# Altium PCB PCB1.PcbDoc
Units mm, origin at the board's own origin, x right, y up, seen from the top; angles counter-clockwise.
Board outline 80 x 100 mm, 2 copper layers (Top Layer, Bottom Layer), stack 1.571 mm thick; 51 components, 42 nets, 209 pads, 13 vias.
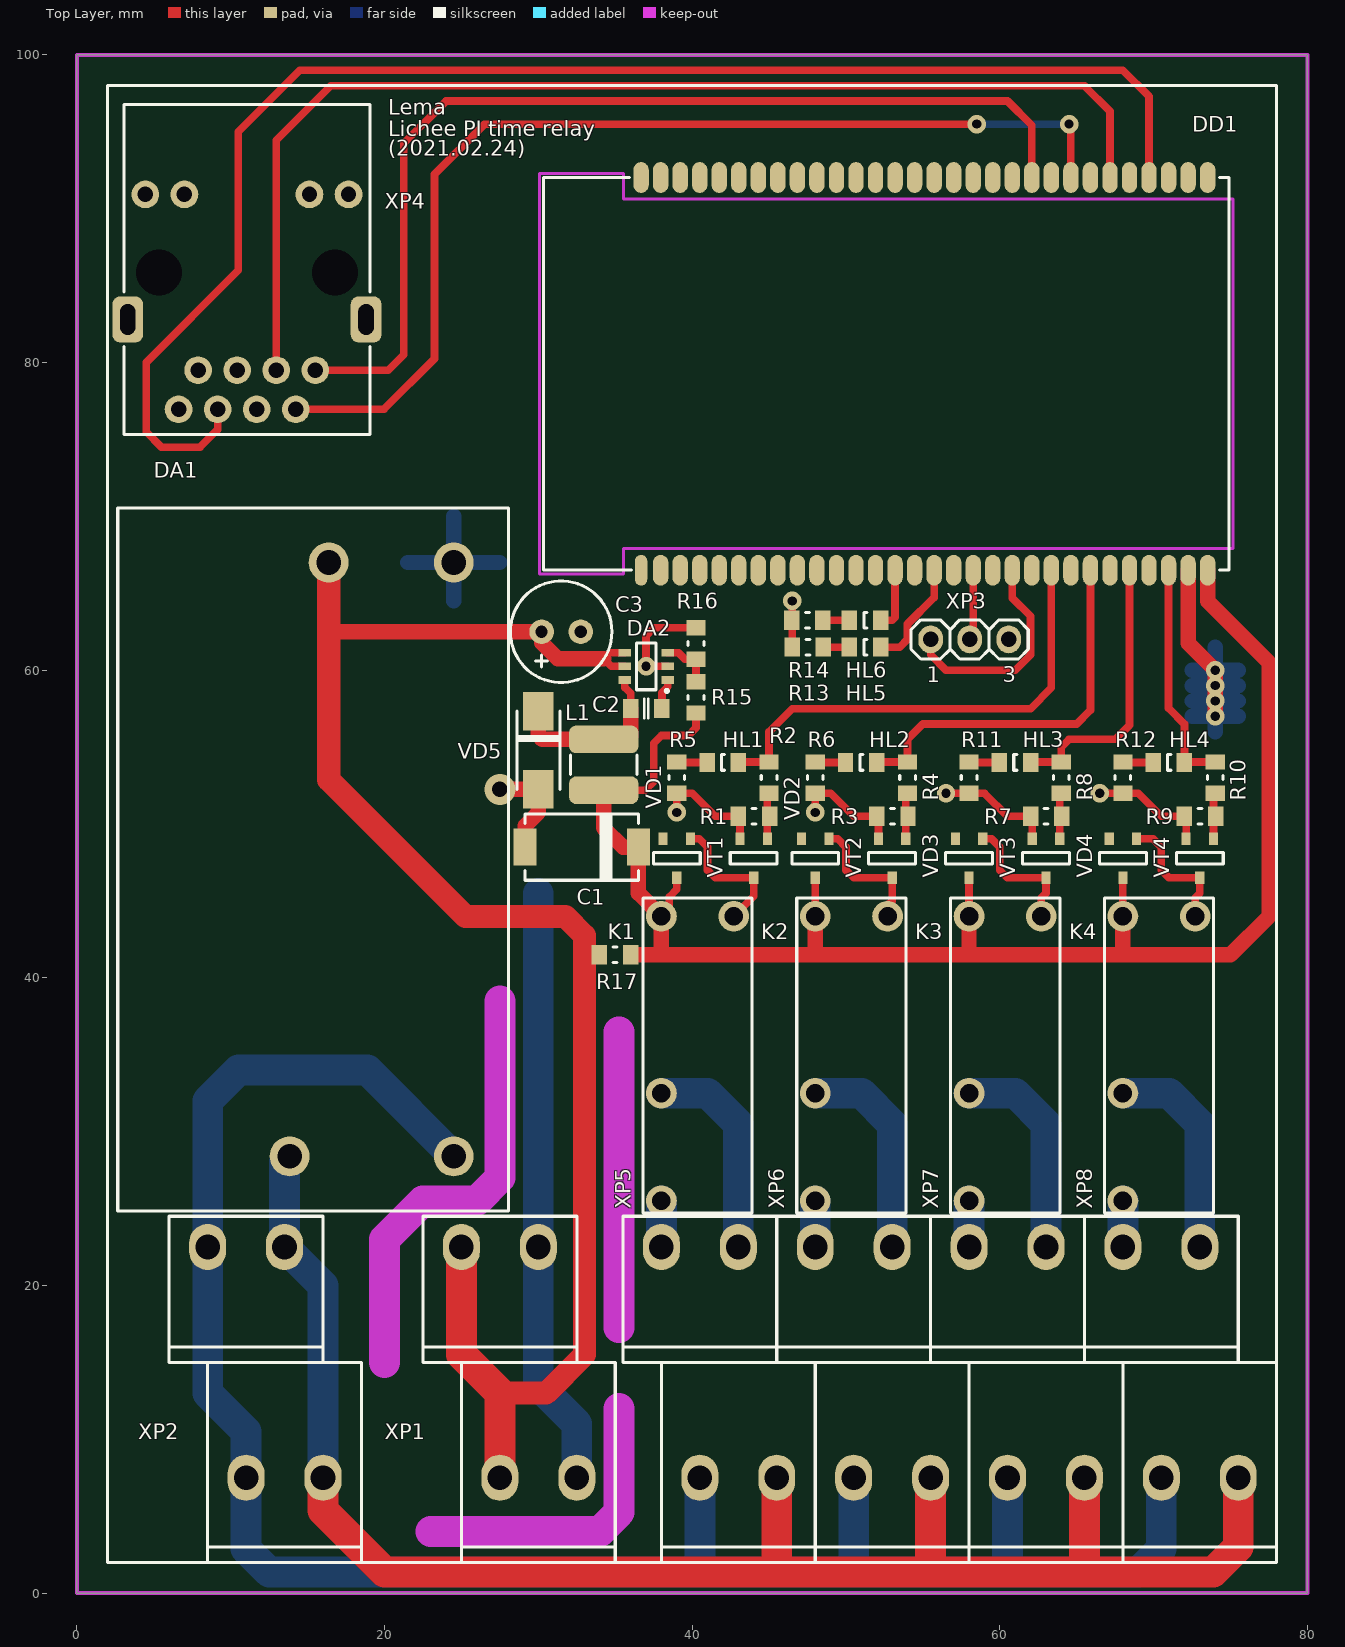
[diagram p0: Top Layer view]
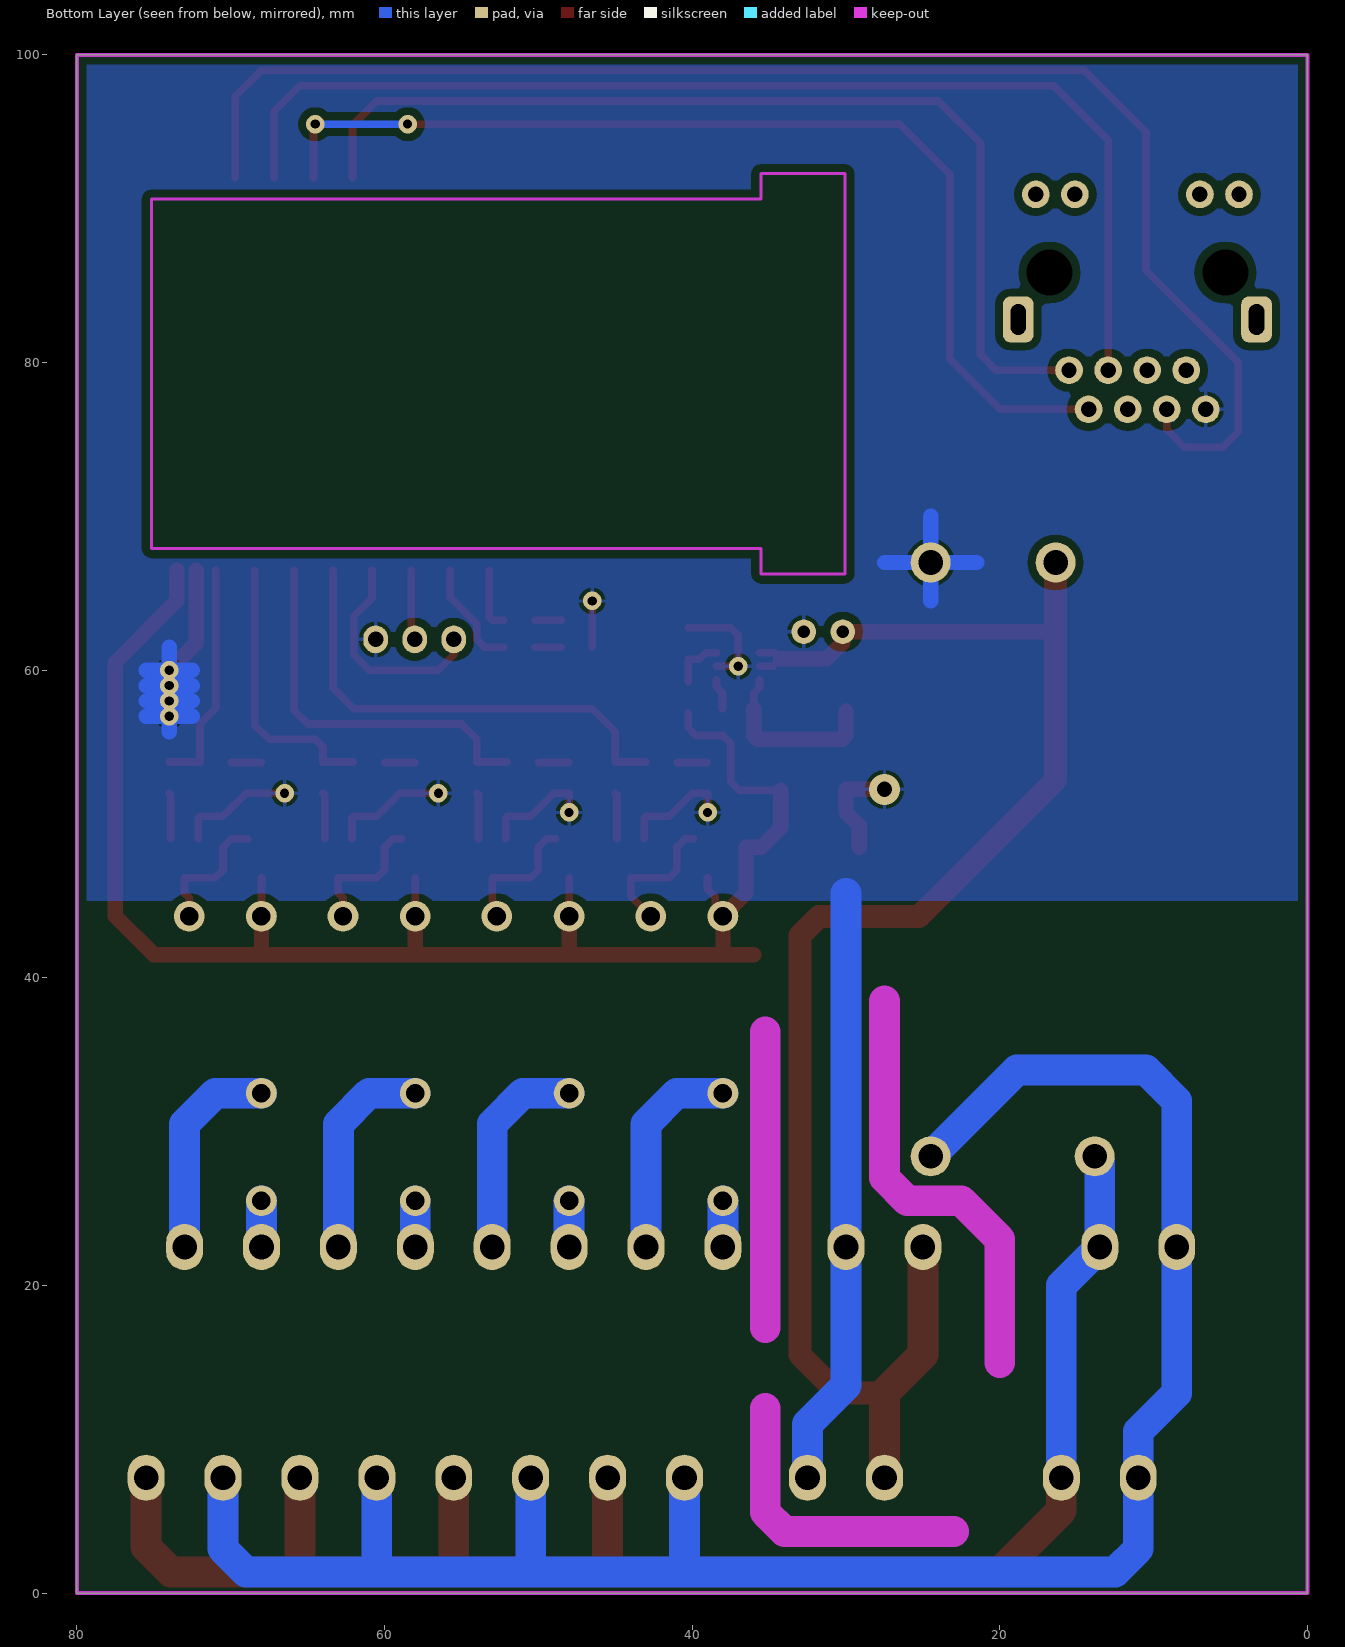
[diagram p1: Bottom Layer view, seen from below]

## Layer stack, top to bottom
Top Solder: solder mask 0.0102, Solder Resist, Dk 3.5
Top Layer: signal copper 0.0356
Dielectric 1: dielectric 1.5, FR-4, Dk 4.8
Bottom Layer: signal copper 0.0356
Bottom Solder: solder mask 0.0102, Solder Resist, Dk 3.5

## Board outline
0,0 0,100 80,100 80,0

## Design rules (kind name [scope] priority, off if disabled: settings)
Clearance Clearance_3 [InPadClass('mount')] p1: gap=2
Clearance Clearance_2 [(InNet('RU 220'))] p2: gap=1
Clearance Clearance_1 [InPolygon] p3: gap=0.5
Clearance [All] p4: gap=0.25
ComponentClearance [All] p1: gap=0 collisioncheckmode=3 verticalgap=0 showdistances=FALSE
HoleSize [All] p1: absolutevalues=TRUE maxlimit=111 minlimit=0.025 maxpercent=80.000 minpercent=20.000
HoleToHoleClearance [All] p1: gap=0.01 allowstackedmicrovias=TRUE
MinimumSolderMaskSliver [All] p1: minsoldermaskwidth=0.01
PolygonConnect PolygonConnect_1 [InNet('3V3')] p1: connectstyle=Direct reliefconductorwidth=0.254 reliefentries=4 polygonreliefangle="90 Angle" airgapwidth=0.254
PolygonConnect [All] p2: connectstyle=Relief reliefconductorwidth=0.254 reliefentries=4 polygonreliefangle="90 Angle" airgapwidth=0.254
RoutingVias [All] p1: holewidth=0.6 width=1.2 viastyle="Through Hole" minholewidth=0.5 minwidth=1 maxholewidth=111 maxwidth=111
SilkToSilkClearance [All] p1: silktosilkclearance=0.01
SilkToSolderMaskClearance [IsPad] p1: minsilkscreentomaskgap=0.01 clearancetoexposedcopper=TRUE
SolderMaskExpansion [All] p1: expansion=0.102
UnpouredPolygon [All] p1: allowunpoured=FALSE
Width [All] p1: maxlimit=111 minlimit=0.25 preferedwidth=0.25 minimp=50.000000 maximp=50.000000 favimp=50.000000
23 further rules are at their usual default settings.

## Components (designator, comment, footprint, x,y, rotation, side; value= is the part's Value field where it differs from the comment)
C1 "100u" "TECap D" 29.134,48.5 r0 top
C2 "150n" "Cap Ceramic 0805" 38.032,57.5 r180 top
C3 "47u" "Cap electro d6.3x2.54mm" 32.75,62.5 r180 top
DA1 "IRM-10-5" IRM-10-xx 24.5,67 r270 top
DA2 "LM2842-ADJ" SOT-23-6_2 35.75,60.25 r90 top
DD1 "LICHEE PI ZERO" "lichee pi zero" 36.68,66.5 r90 top
HL1 "LED" "LED 0805" 43,54 r180 top
HL2 "LED" "LED 0805" 52,54 r180 top
HL3 "LED" "LED 0805" 62,54 r180 top
HL4 "LED" "LED 0805" 72,54 r180 top
HL5 "LED" "LED 0805" 52.25,61.5 r180 top
HL6 "LED" "LED 0805" 52.25,63.25 r180 top
K1 "G5NB-1A-E" G5NB1AE 38,44 r270 top
K2 "G5NB-1A-E" G5NB1AE 48,44 r270 top
K3 "G5NB-1A-E" G5NB1AE 58,44 r270 top
K4 "G5NB-1A-E" G5NB1AE 68,44 r270 top
L1 "SDR0403-470" SDR0403 34.25,55.5 r270 top
R1 "10k" "Resistor 0805" 43,50.5 r0 top
R2 "1k" "Resistor 0805" 45,52 r90 top
R3 "10k" "Resistor 0805" 52,50.5 r0 top
R4 "1k" "Resistor 0805" 54,52 r90 top
R5 "10k" "Resistor 0805" 39,52 r90 top
R6 "10k" "Resistor 0805" 48,52 r90 top
R7 "10k" "Resistor 0805" 62,50.5 r0 top
R8 "1k" "Resistor 0805" 64,52 r90 top
R9 "10k" "Resistor 0805" 72,50.5 r0 top
R10 "1k" "Resistor 0805" 74,52 r90 top
R11 "10k" "Resistor 0805" 58,52 r90 top
R12 "10k" "Resistor 0805" 68,52 r90 top
R13 "10k" "Resistor 0805" 46.5,61.5 r0 top
R14 "10k" "Resistor 0805" 46.468,63.25 r0 top
R15 "5k6" "Resistor 0805" 40.25,59.25 r270 top
R16 "1k" "Resistor 0805" 40.25,62.75 r270 top
R17 "0R" "Resistor 0805" 33.968,41.5 r0 top
VD1 "BAS40-04" SOT-23-3 39,46.5 r180 top
VD2 "BAS40-04" SOT-23-3 48,46.5 r180 top
VD3 "BAS40-04" SOT-23-3 58,46.5 r180 top
VD4 "BAS40-04" SOT-23-3 68,46.5 r180 top
VD5 "SS14" "DO-214AC SMA" 30,57.33 r270 top
VT1 "BC847" SOT-23-3 44,46.5 r180 top
VT2 "BC847" SOT-23-3 53,46.5 r180 top
VT3 "BC847" SOT-23-3 63,46.5 r180 top
VT4 "BC847" SOT-23-3 73,46.5 r180 top
XP1 "KF129A 5,0 2P" "KF129A 5,0 2P" 25,22.5 r0 top
XP2 "KF129A 5,0 2P" "KF129A 5,0 2P" 8.5,22.5 r0 top
XP3 "Pins 1x3" "Pins 1x3" 55.5,62 r0 top
XP4 "HR911105A" HR911105A 15.5,79.5 r0 top
XP5 "KF129A 5,0 2P" "KF129A 5,0 2P" 38,22.5 r0 top
XP6 "KF129A 5,0 2P" "KF129A 5,0 2P" 48,22.5 r0 top
XP7 "KF129A 5,0 2P" "KF129A 5,0 2P" 58,22.5 r0 top
XP8 "KF129A 5,0 2P" "KF129A 5,0 2P" 68,22.5 r0 top

## Footprints (in the part's own frame and the unit in brackets; to place one, negate y for a bottom-side part, rotate by r counter-clockwise, add the part's x,y. Pads: shape width x height; smd on the part's side, far side on the other; paste and mask are expansions set on the pad)
"Cap Ceramic 0805" [mm]
  rect 1x1.25 smd: 1(0,0) 2(2.032,0)
  silkscreen extent 0.89,-0.63 1.14,0.64
"Cap electro d6.3x2.54mm" [mm]
  round 1.6 hole 0.8: 1(0,0) 2(2.54,0)
  silkscreen extent -2.03,-3.3 4.57,3.3
"DO-214AC SMA" [mm]
  rect 2.5x2 smd: 1(5.08,0) 2(0,0)
  silkscreen extent 0,-1.4 5.08,1.4
G5NB1AE [mm]
  round 2 hole 1.2: 1(0,0) 2(0,4.7) 3(11.5,0) 4(18.5,0)
  silkscreen extent -1.2,-1.2 19.3,5.9
HR911105A [mm]
  rrect50% 2x3 hole 1 slot 2 at 90 deg: 0(-12.192,3.302) 0(3.302,3.302)
  round 2.9 hole 3 unplated: 0(-10.16,6.35) 0(1.27,6.35)
  round 1.8 hole 1: 1(0,0) 2(-1.27,-2.54) 3(-2.54,0) 4(-3.81,-2.54) 5(-5.08,0) 6(-6.35,-2.54) 7(-7.62,0) 8(-8.89,-2.54) 9(2.159,11.43) 10(-0.381,11.43) 11(-8.509,11.43) 12(-11.049,11.43)
  silkscreen extent -12.45,-4.19 3.56,17.27
IRM-10-xx [mm]
  round 2.6 hole 1.6: 1(0,0) 2(0,-8.128) 3(38.608,0) 4(38.608,-10.668)
  silkscreen extent -3.56,-21.84 42.16,3.56
"KF129A 5,0 2P" [mm]
  oval 2.4x3 hole 1.6: 1(0,0) 2(2.5,-15) 3(5,0) 4(7.5,-15)
  silkscreen extent -2.5,-20.5 10,2
"LED 0805" [mm]
  rect 1x1.25 smd: 1(0,0) 2(2.032,0)
  silkscreen extent 0.89,-0.51 1.09,0.51
"lichee pi zero" [mm]
  oval 2x0.8 smd: 1(0,0)
  oval 2x1 smd: 2(0,-1.27) 3(0,-2.54) 4(0,-3.81) 5(0,-5.08) 6(0,-6.35) 7(0,-7.62) 8(0,-8.89) 9(0,-10.16) 10(0,-11.43) 11(0,-12.7) 12(0,-13.97) 13(0,-15.24) 14(0,-16.51) 15(0,-17.78) 16(0,-19.05) 17(0,-20.32) 18(0,-21.59) 19(0,-22.86) 20(0,-24.13) 21(0,-25.4) 22(0,-26.67) 23(0,-27.94) 24(0,-29.21) 25(0,-30.48) 26(0,-31.75) 27(0,-33.02) 28(0,-34.29) 29(0,-35.56) 30(0,-36.83) 31(25.527,-36.83) 32(25.527,-35.56) 33(25.527,-34.29) 34(25.527,-33.02) 35(25.527,-31.75) 36(25.527,-30.48) 37(25.527,-29.21) 38(25.527,-27.94) 39(25.527,-26.67) 40(25.527,-25.4) 41(25.527,-24.13) 42(25.527,-22.86) 43(25.527,-21.59) 44(25.527,-20.32) 45(25.527,-19.05) 46(25.527,-17.78) 47(25.527,-16.51) 48(25.527,-15.24) 49(25.527,-13.97) 50(25.527,-12.7) 51(25.527,-11.43) 52(25.527,-10.16) 53(25.527,-8.89) 54(25.527,-7.62) 55(25.527,-6.35) 56(25.527,-5.08) 57(25.527,-3.81) 58(25.527,-2.54) 59(25.527,-1.27) 60(25.527,0)
  silkscreen extent 0,-38.23 25.53,6.35
"Pins 1x3" [mm]
  oval 1.6x1.8 hole 1: 1(0,0) 2(2.54,0) 3(5.08,0)
  silkscreen extent -1.27,-1.27 6.35,1.27
"Resistor 0805" [mm]
  rect 1x1.25 smd: 1(0,0) 2(2.032,0)
  silkscreen extent 0.89,-0.51 1.14,0.51
SDR0403 [mm]
  rrect50% 1.8x4.5 smd: 1(0,0) 2(3.302,0)
  silkscreen extent 1.02,-2.16 2.29,2.16
SOT-23-3 [mm]
  rect 0.6x0.8 smd: 1(-0.889,-2.54) 2(0.889,-2.54) 3(0,0)
  silkscreen extent -1.52,-1.65 1.52,-0.89
SOT-23-6_2 [mm]
  rect 0.5x0.8 smd: 1(-0.889,-2.667) 2(0,-2.667) 3(0.889,-2.667) 4(0.889,0.127) 5(0,0.133) 6(-0.889,0.127)
  silkscreen extent -1.7,-2.7 1.52,-0.63
"TECap D" [mm]
  rect 1.5x2.4 smd: 1(0,0) 2(7.366,0)
  silkscreen extent 0,-2.16 7.37,2.16

## Part data
C1: library part TECap
C2: library part "Capacitor Nonpolar"
C3: library part ECap
DA1: library part IRM-10-xx
DA2: library part LM284x
L1: library part SDR0403-xxx
R1 R2 R3 R4 R5 R6 R7 R8 R9 R10 R11 R12 R13 R14 R15 R16 R17: library part "Resistor 0,125W"

## Via types
v1: diameter 1.2, hole 0.6, Top Layer to Bottom Layer, tented both sides, 12 vias
v2: diameter 2, hole 1, Top Layer to Bottom Layer, tented both sides, 1 vias

## Nets (pads, with @x,y where several pads share a name; then routed paths per layer and width w, separated by ;. In a path a pad name is that pad's centre, name@x,y a point inside that pad or via, vN(x,y) a via of type N, cw(c..) or ccw(c..) an arc to the next point about the centre after c; other vN are vias at no path point)
+5V: C1.2 DD1.30 K1.1 K2.1 K3.1 K4.1 L1.2 R15.2 R17.2 VD1.3 VD2.3 VD3.3 VD4.3 | length 107.6
  Top Layer w0.5: L1.2 36.948,52.198 37.5,52.75 37.5,55.25 38,55.75 39.75,55.75 40.25,56.25 R15.2 ; K1.1 38.5,44.5 38.5,45.25 39,45.75 VD1.3 ; K2.1 VD2.3 ; K3.1 VD3.3 ; K4.1 VD4.3
  Top Layer w1: L1.2 34.25,49.75 35.5,48.5 C1.2 36.5,45.5 K1.1 38,41.5 ; R17.2 38,41.5 ; K2.1 48,41.5 ; K3.1 58,41.5 ; K4.1 68,41.5 ; DD1.30 73.51,64.49 77.5,60.5 77.5,44 75,41.5 68,41.5 ; 38,41.5 48,41.5 ; 48,41.5 58,41.5 ; 58,41.5 68,41.5
ETH_RXN: DD1.34 XP4.6 | length 95.7
  Top Layer w0.5: XP4.6 9.15,75.65 8,74.5 5.5,74.5 4.5,75.5 4.5,80 10.5,86 10.5,95 14.5,99 68,99 69.7,97.3 DD1.34
ETH_RXP: DD1.36 XP4.3 | length 75.6
  Top Layer w0.5: XP4.3 12.96,94.46 16.5,98 65.5,98 67.16,96.34 DD1.36
ETH_TXN: DD1.38 XP4.2 | length 68.5
  Top Layer w0.5: XP4.2 19.96,76.96 23.25,80.25 23.25,92.25 26.5,95.5 v1(58.5,95.5) ; v1(64.5,95.5) 64.62,95.38 DD1.38
  Bottom Layer w0.5: v1(58.5,95.5) v1(64.5,95.5)
ETH_TXP: DD1.40 XP4.1 | length 65.9
  Top Layer w0.5: XP4.1 20.25,79.5 21.25,80.5 21.25,94.25 24,97 60.5,97 62.08,95.42 DD1.40
GND: C1.1 C3.1 DA1.1 DA2.2 DD1.29 R1.1 R3.1 R5.1 R6.1 R7.1 R9.1 R11.1 R12.1 R13.1 R14.1 R16.1 VD5.1 VT1.2 VT2.2 VT3.2 VT4.2 XP1.3 XP1.4 XP3.3 XP4.8 | length 124.6
  Top Layer w0.5: DA2.2 v1(37,60.25) 37,62.25 37.5,62.75 R16.1 ; v1(39,50.75) R5.1 40,52 41.5,50.5 R1.1 43.111,50.389 VT1.2 ; R13.1 v1(46.5,64.5) ; v1(48,50.75) R6.1 49,52 50.5,50.5 R3.1 ; VT2.2 R3.1@52.111,50.389 ; v1(56.5,52) R11.1 59,52 60.5,50.5 R7.1 62.111,50.389 VT3.2 ; v1(66.5,52) R12.1 69,52 70.5,50.5 R9.1 72.111,50.389 VT4.2
  Top Layer w1: v2(27.5,52.25) VD5.1 30,50.75 29.134,49.884 C1.1 ; DD1.29 72.24,61.76 v1(74,60) v1(74,59) v1(74,58) v1(74,57)
  Bottom Layer w1: 21.5,67 DA1.1 ; 24.5,64.5 DA1.1 ; 24.5,70 DA1.1 ; 27.5,67 DA1.1 ; 72.5,57 v1(74,57) ; 72.5,58 v1(74,58) ; 72.5,59 v1(74,59) ; 72.5,60 v1(74,60) ; 74,55.991 v1(74,57) ; 74,61.5 v1(74,60) ; 75.5,57 v1(74,57) ; 75.5,58 v1(74,58) ; 75.5,59 v1(74,59) ; 75.5,60 v1(74,60) ; v1(74,57) v1(74,58) ; v1(74,58) v1(74,59) ; v1(74,59) v1(74,60)
  Bottom Layer w2: 30,45.5 XP1.3 30,13.5 32.5,11 XP1.4
L: DA1.3 XP2.1 XP2.2 XP5.2 XP6.2 XP7.2 XP8.2 | length 133
  Bottom Layer w2: DA1.3 18.892,34 10.5,34 8.5,32 XP2.1 8.5,13 11,10.5 XP2.2 11,2.877 12.5,1.377 40.5,1.377 ; XP5.2 40.5,1.377 ; XP6.2 50.5,1.377 ; XP7.2 60.5,1.377 ; XP8.2 70.5,2.877 69,1.377 60.5,1.377 ; 40.5,1.377 50.5,1.377 ; 50.5,1.377 60.5,1.377
LED0: DD1.16 HL5.1 | length 7.2
  Top Layer w0.5: HL5.1 53.5,61.5 54,62 54,63 55.73,64.73 DD1.16
LED1: DD1.14 HL6.1 | length 4.1
  Top Layer w0.5: HL6.1 53,63.25 53.19,63.44 DD1.14
N: DA1.4 XP2.3 XP2.4 XP5.4 XP6.4 XP7.4 XP8.4 | length 108.9
  Top Layer w2: XP2.4 16,5.377 20,1.377 45.5,1.377 ; XP5.4 45.5,1.377 ; XP6.4 55.5,1.377 ; XP7.4 65.5,1.377 ; XP8.4 75.5,3 73.877,1.377 65.5,1.377 ; 45.5,1.377 55.5,1.377 ; 55.5,1.377 65.5,1.377
  Bottom Layer w2: DA1.4 13.5,28.06 XP2.3 16,20 XP2.4
NetC2_1: C2.1 DA2.1 | length 2
  Top Layer w0.5: C2.1 38.032,58.532 38.417,58.917 DA2.1
NetC2_2: C2.2 DA2.6 L1.1 VD5.2 | length 11.6
  Top Layer w0.5: DA2.6 35.623,58.877 36,58.5 C2.2
  Top Layer w1: VD5.2 30,55.75 30.25,55.5 L1.1 35.75,55.5 36,55.75 C2.2
NetDA2_3: DA2.3 R15.1 R16.2 | length 3.5
  Top Layer w0.5: DA2.3 39.111,61.139 39.532,60.718 R16.2 R15.1
NetHL1_2: HL1.2 R5.2 | length 1.9
  Top Layer w0.5: R5.2@39.032,54 HL1.2
NetHL2_2: HL2.2 R6.2 | length 1.9
  Top Layer w0.5: R6.2@48.032,54 HL2.2
NetHL3_2: HL3.2 R11.2 | length 1.9
  Top Layer w0.5: R11.2@58.032,54 HL3.2
NetHL4_2: HL4.2 R12.2 | length 1.9
  Top Layer w0.5: R12.2@68.032,54 HL4.2
NetHL5_2: HL5.2 R13.2 | length 1.7
  Top Layer w0.5: R13.2 HL5.2
NetHL6_2: HL6.2 R14.2 | length 1.7
  Top Layer w0.5: R14.2 HL6.2
NetK1_2: K1.2 VD1.1 VT1.3 | length 9.1
  Top Layer w0.5: VD1.1 40.46,49.04 41,48.5 41,47 41.5,46.5 VT1.3 44,45.3 K1.2
NetK1_3: K1.3 XP5.3 | length 13.8
  Bottom Layer w2: K1.3 41,32.5 43,30.5 XP5.3
NetK1_4: K1.4 XP5.1 | length 3
  Bottom Layer w2: XP5.1 K1.4
NetK2_2: K2.2 VD2.1 VT2.3 | length 8.7
  Top Layer w0.5: VD2.1 49.46,49.04 50,48.5 50,47 50.5,46.5 VT2.3 53,45 52.7,44.7 K2.2
NetK2_3: K2.3 XP6.3 | length 13.8
  Bottom Layer w2: K2.3 51,32.5 53,30.5 XP6.3
NetK2_4: K2.4 XP6.1 | length 3
  Bottom Layer w2: XP6.1 K2.4
NetK3_2: K3.2 VD3.1 VT3.3 | length 8.7
  Top Layer w0.5: VD3.1 59.46,49.04 60,48.5 60,47 60.5,46.5 VT3.3 63,45.5 62.7,45.2 K3.2
NetK3_3: K3.3 XP7.3 | length 13.8
  Bottom Layer w2: K3.3 61,32.5 63,30.5 XP7.3
NetK3_4: K3.4 XP7.1 | length 3
  Bottom Layer w2: XP7.1 K3.4
NetK4_2: K4.2 VD4.1 VT4.3 | length 8.7
  Top Layer w0.5: VD4.1 69.96,49.04 70.5,48.5 70.5,47 71,46.5 VT4.3 73,45.5 72.7,45.2 K4.2
NetK4_3: K4.3 XP8.3 | length 13.8
  Bottom Layer w2: K4.3 71,32.5 73,30.5 XP8.3
NetK4_4: K4.4 XP8.1 | length 3
  Bottom Layer w2: XP8.1 K4.4
NetR1_2: R1.2 R2.1 VT1.1 | length 3
  Top Layer w0.5: VT1.1 44.889,51.889 R2.1
NetR3_2: R3.2 R4.1 VT2.1 | length 3
  Top Layer w0.5: VT2.1 53.889,51.889 R4.1
NetR7_2: R7.2 R8.1 VT3.1 | length 3
  Top Layer w0.5: VT3.1 63.889,51.889 R8.1
NetR9_2: R9.2 R10.1 VT4.1 | length 3
  Top Layer w0.5: VT4.1 73.889,51.889 R10.1
R0: DD1.22 HL1.1 R2.2 | length 31.1
  Top Layer w0.5: HL1.1@43.032,54.032 R2.2 45,56 46.5,57.5 62,57.5 63.35,58.85 DD1.22
R1: DD1.24 HL2.1 R4.2 | length 25.2
  Top Layer w0.5: HL2.1@52.032,54.032 R4.2 54,55.5 55,56.5 65,56.5 65.89,57.39 DD1.24
R2: DD1.26 HL3.1 R8.2 | length 18
  Top Layer w0.5: HL3.1@62.032,54.032 R8.2 64,55 64.5,55.5 67.5,55.5 68.43,56.43 DD1.26
R3: DD1.28 HL4.1 R10.2 | length 14.9
  Top Layer w0.5: DD1.28 70.97,57.53 72,56.5 HL4.1 ; HL4.1@72.032,54.032 R10.2
RX: DD1.20 XP3.1 | length 14.3
  Top Layer w0.5: XP3.1 55.5,61 56.5,60 61,60 62,61 62,63.5 60.81,64.69 DD1.20
TX: DD1.18 XP3.2 | length 4.6
  Top Layer w0.5: XP3.2 58.27,62.23 DD1.18
VCC: C3.2 DA1.2 DA2.4 DA2.5 R17.1 XP1.1 XP1.2 | length 106.9
  Top Layer w0.5: DA2.5 34.75,60.25 34.25,60.75 34.639,61.139 DA2.4
  Top Layer w1: 16.372,62.5 C3.2 30.21,61.79 31.25,60.75 34.25,60.75
  Top Layer w1.5: DA1.2 16.372,62.5 16.372,52.878 25.25,44 31.75,44 33,42.75 33,15.5 30.5,13 27.5,13
  Top Layer w2: XP1.1 25,15.5 27.5,13 XP1.2
pads on no net: DD1.1 DD1.2 DD1.3 DD1.4 DD1.5 DD1.6 DD1.7 DD1.8 DD1.9 DD1.10 DD1.11 DD1.12 DD1.13 DD1.15 DD1.17 DD1.19 DD1.21 DD1.23 DD1.25 DD1.27 DD1.31 DD1.32 DD1.33 DD1.35 DD1.37 DD1.39 DD1.41 DD1.42 DD1.43 DD1.44 DD1.45 DD1.46 DD1.47 DD1.48 DD1.49 DD1.50 DD1.51 DD1.52 DD1.53 DD1.54 DD1.55 DD1.56 DD1.57 DD1.58 DD1.59 DD1.60 VD1.2 VD2.2 VD3.2 VD4.2 XP4.0 XP4.4 XP4.5 XP4.7 XP4.9 XP4.10 XP4.11 XP4.12

## Polygon pours and split planes (outlines as drawn)
GND on Bottom Layer "Bottom Layer-GND" (solid, remove dead copper, pour order 0): 0,45 80,45 80,100 0,100

## Keep-outs
Keep-Out Layer:
  lines w0.2: 30.076,66.246 35.537,66.246 35.537,67.897 75.161,67.897 75.161,90.63 35.537,90.63 35.537,92.281 30.076,92.281 30.076,66.246
  lines w0.254: 0,0 0,100 80,100 80,0 0,0
  lines w2: 20,15 20,23 22.5,25.5 26,25.5 27.5,27 27.5,38.5 ; 23,4 34,4 35.25,5.25 35.25,12 ; 35.25,17.25 35.25,36.5

## Silkscreen, mask and mechanical layers (free items; w line width, h text height)
Top Overlay:
  lines w0.2: 2,2 2,98 78,98 78,2 2,2
  text "Lema" at 20.238,96.119 h1
  text "Lichee PI time relay" at 20.238,94.722 h1
  text "(2021.02.24)" at 20.238,93.452 h1

## Text inside footprints (layer, text, board x,y; h text height)
XP3: Top Overlay "1" at 55.246,59.206 h1; Top Overlay "3" at 60.199,59.206 h1